# EAGLE board Hauptplatine_board (EAGLE 8.6.0)
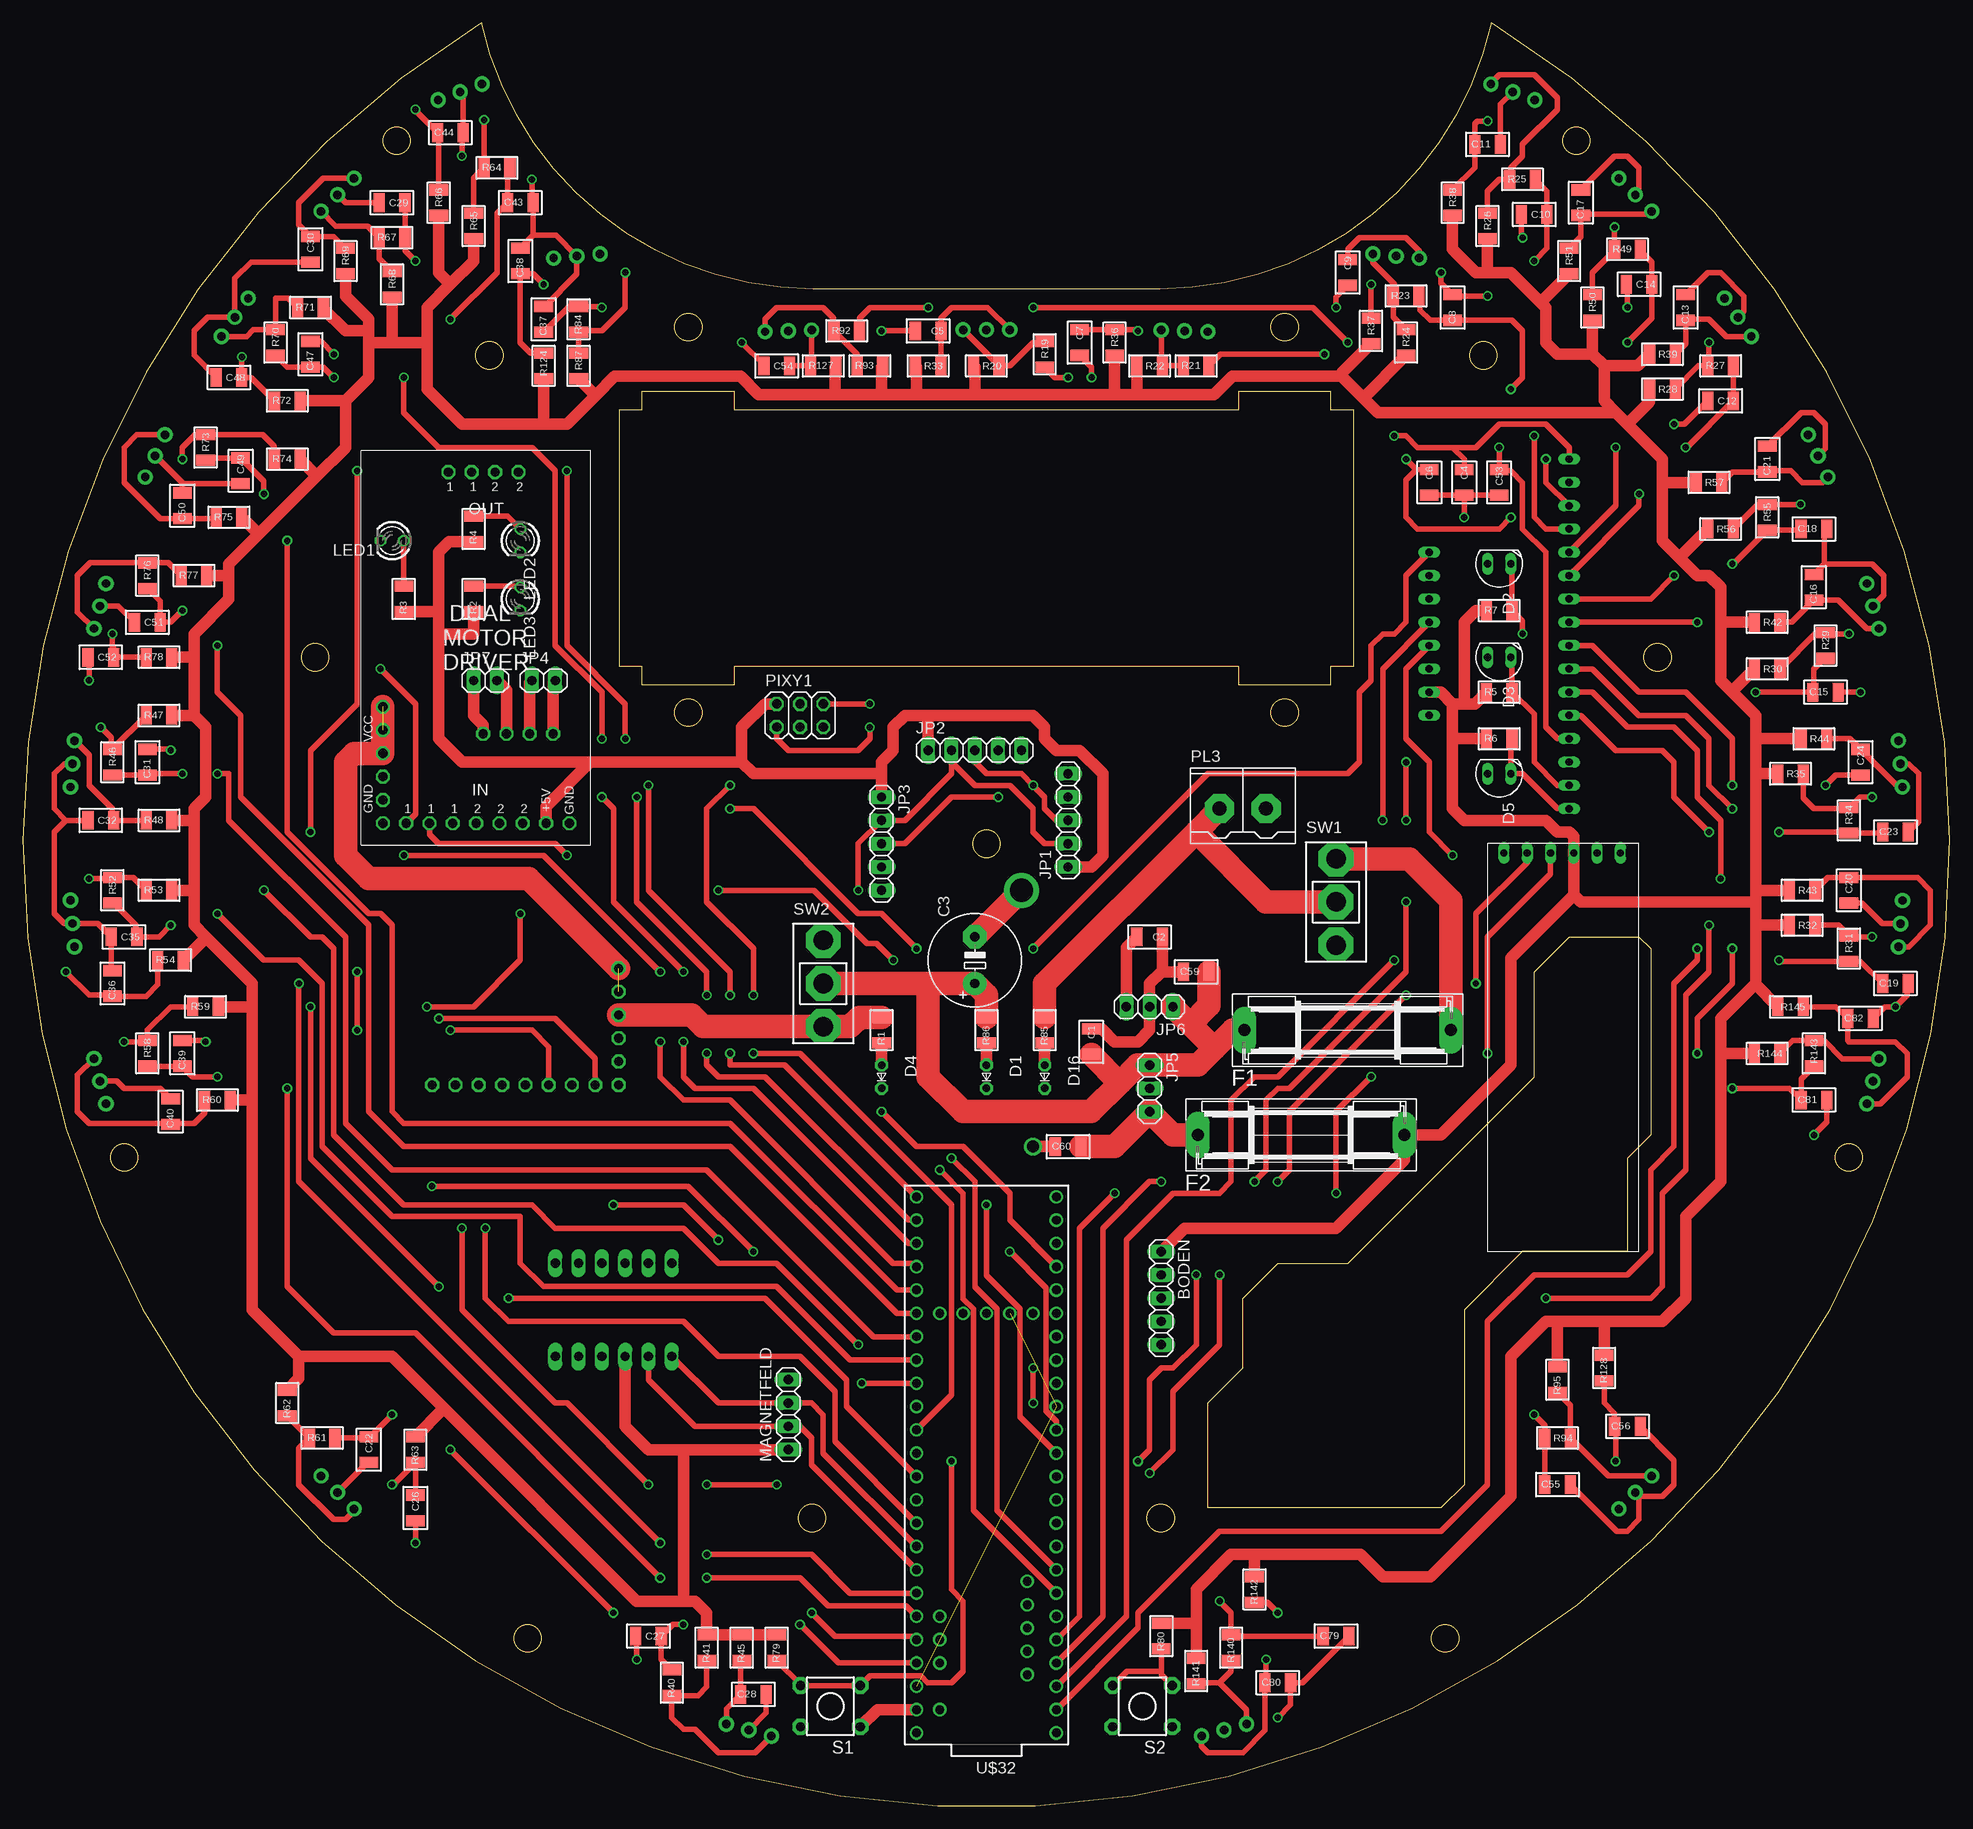
[diagram p0: board, top side]
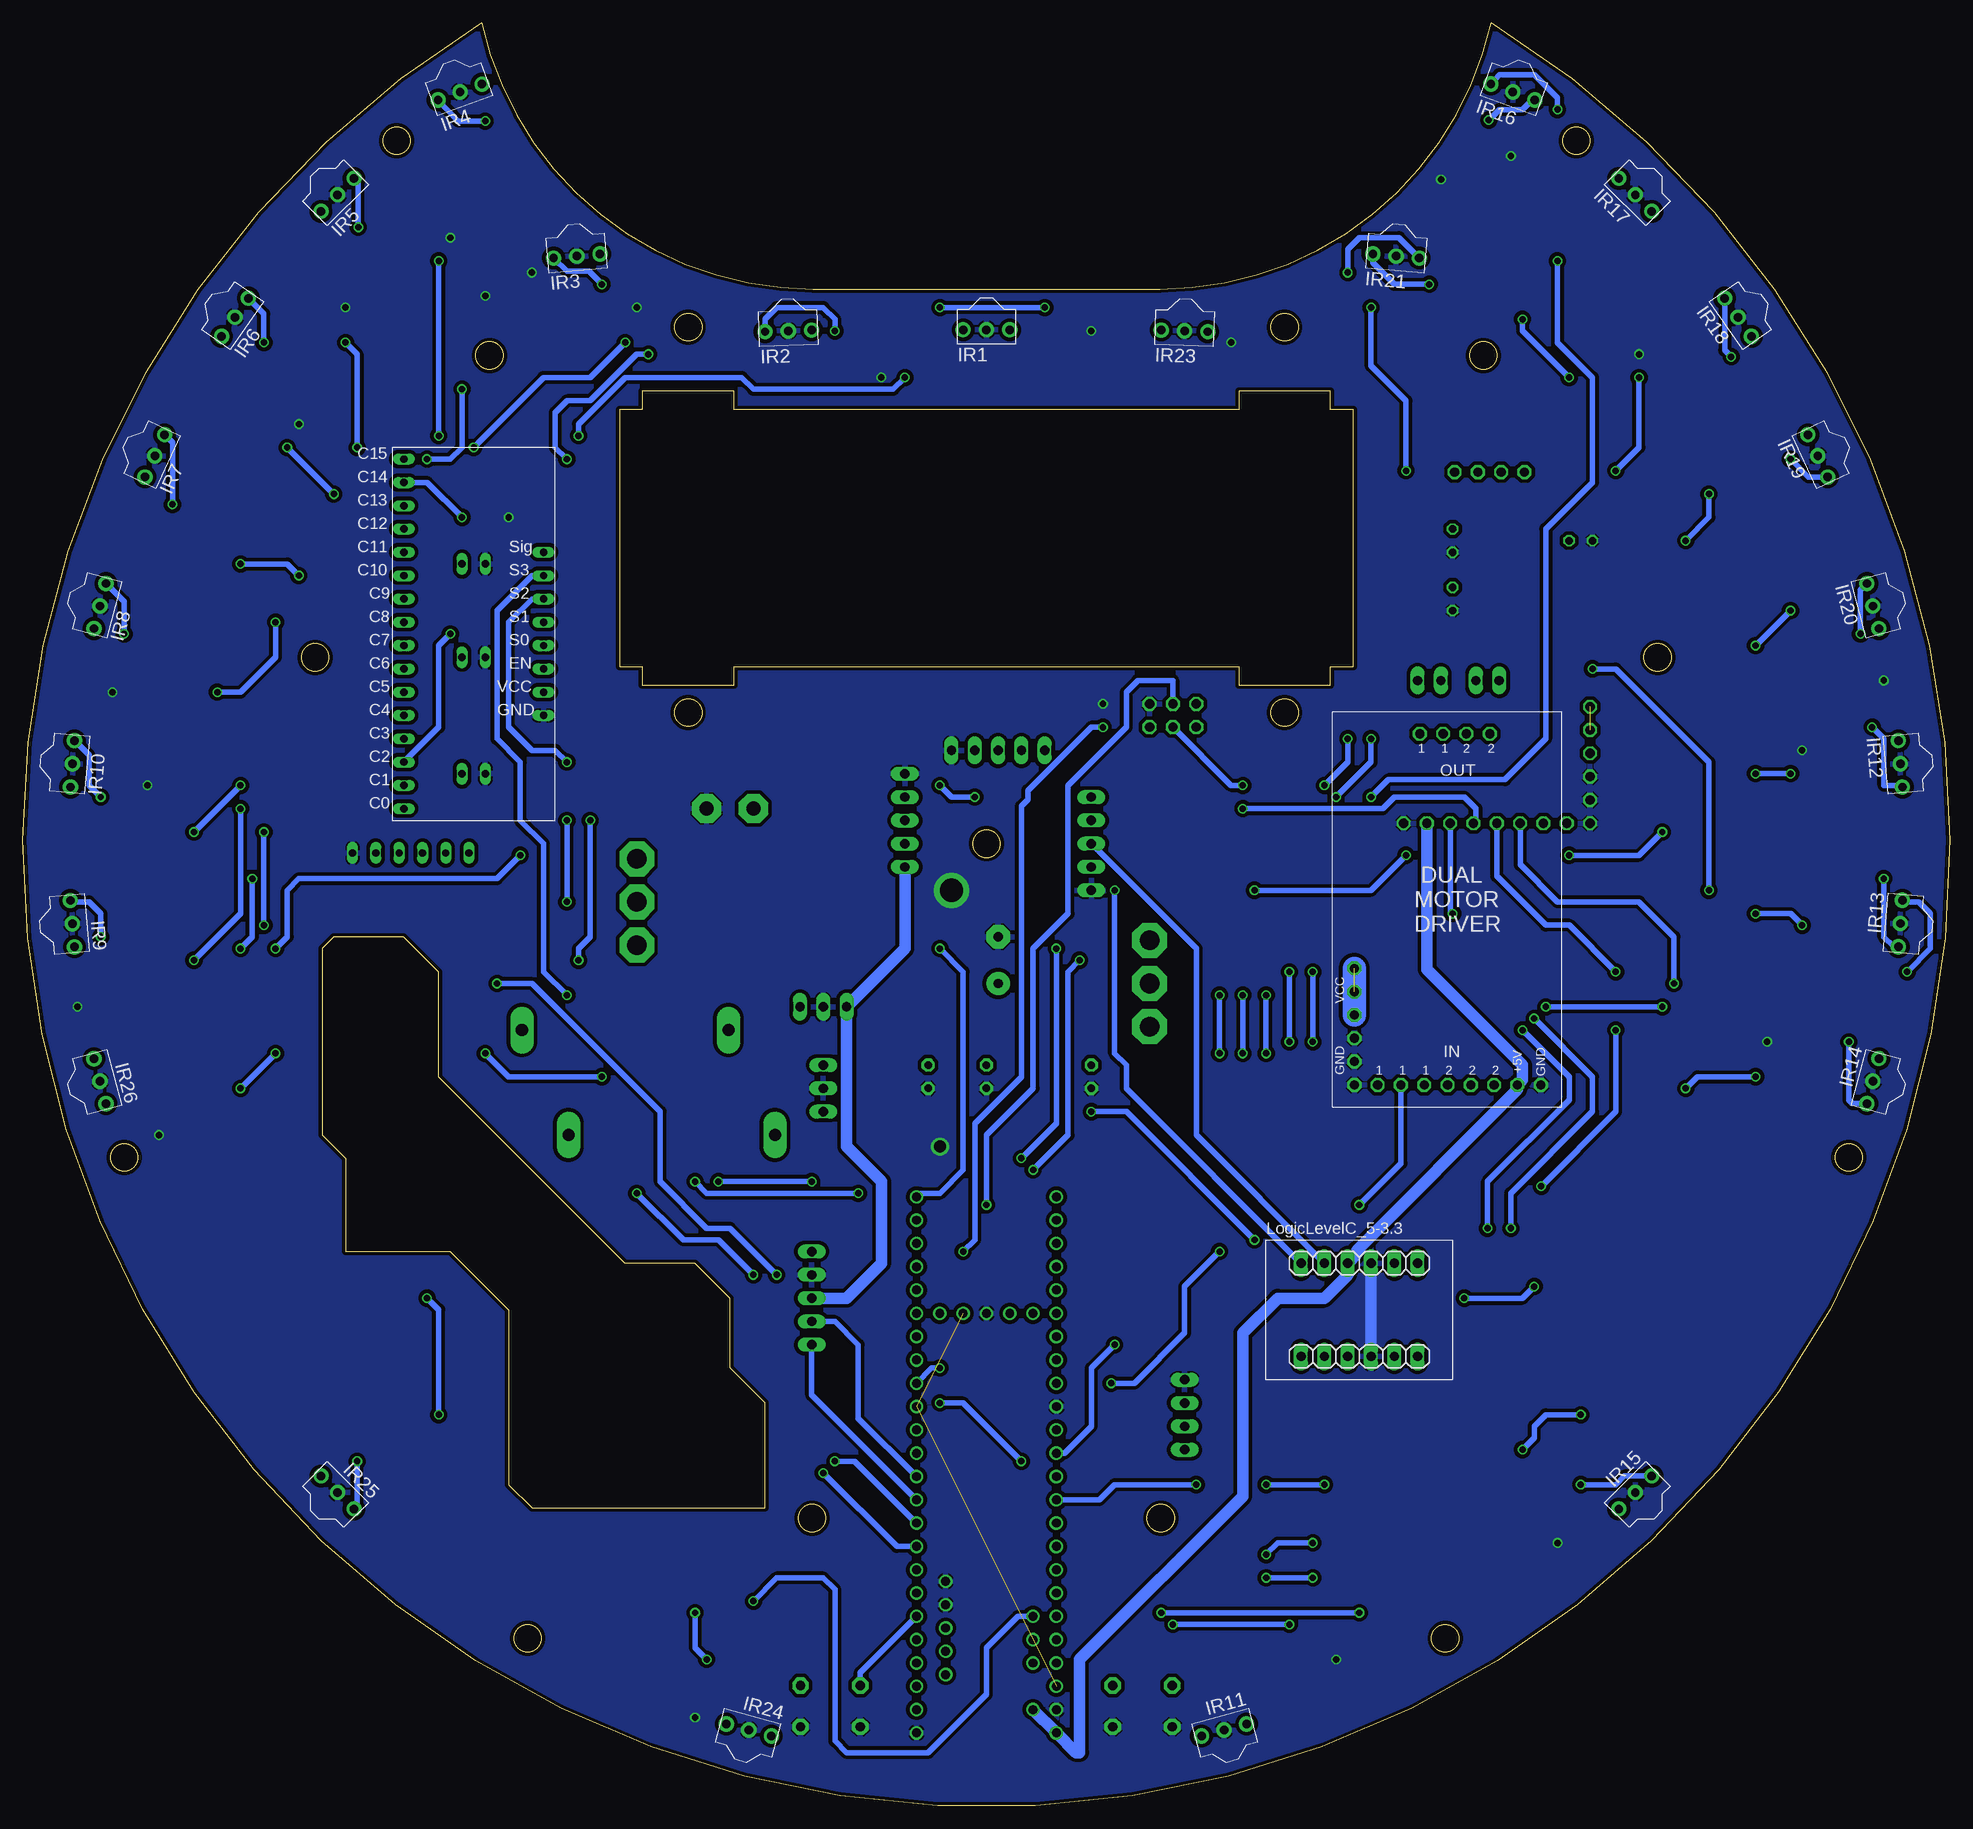
[diagram p1: board, bottom side, seen from below]

Size 210 x 194.31 mm. Coordinates in mm from the lower left corner, seen from the top.
Outline: 67.5,124.16 65,124.16 65,152.16 67.5,152.16 67.5,154.16 77.5,154.16 77.5,152.16 132.5,152.16 132.5,154.16 142.5,154.16 142.5,152.16 145,152.16 145,124.16 142.5,124.16 142.5,122.16 132.5,122.16 132.5,124.16 77.5,124.16 77.5,122.16 67.5,122.16 67.5,124.16
Outline: 50,194.31 arc297 160,194.31 arc-78 123.88,165.31 86.12,165.31 arc-78 50,194.31
Outline: 129.13,32.47 129.13,43.9 132.94,47.71 132.94,55.33 136.75,59.14 144.37,59.14 164.69,79.46 164.69,90.89 168.5,94.7 176.12,94.7 177.39,93.43 177.39,73.11 174.85,70.57 174.85,60.41 163.42,60.41 157.07,54.06 157.07,35.01 154.53,32.47 129.13,32.47
Outline: circle at 72.5,119.16 radius 1.5
Outline: circle at 137.5,119.16 radius 1.5
Outline: circle at 105,104.86 radius 1.5
Outline: circle at 31.85,125.16 radius 1.5
Outline: circle at 50.85,158.07 radius 1.5
Outline: circle at 178.15,125.16 radius 1.5
Outline: circle at 159.15,158.07 radius 1.5
Outline: circle at 124,31.36 radius 1.5
Outline: circle at 86,31.36 radius 1.5
Outline: circle at 137.5,161.16 radius 1.5
Outline: circle at 72.5,161.16 radius 1.5
Outline: circle at 169.28,181.47 radius 1.5
Outline: circle at 40.72,181.47 radius 1.5
Outline: circle at 155,18.26 radius 1.5
Outline: circle at 198.97,70.66 radius 1.5
Outline: circle at 55,18.26 radius 1.5
Outline: circle at 11.03,70.66 radius 1.5
Copper layers (1*16): Top 0.018mm / dielectric 1.55mm / Bottom 0.018mm
Design rules "Multi-CB_2L_100um-Tracks_OL35um": minimum track width 0.1mm, minimum drill 0.2mm, track to track 0.1mm, track to pad 0.1mm, pad to pad 0.1mm, via to via 0.1mm, smd to smd 0mil, copper to edge 0.2mm, drill to drill 0.2mm, minimum pad ring 0.125mm, minimum via ring 0.1mm, stop-mask expansion 2mil, vias tented up to drill 0.45mm, thermal gap 0.2mm

## Footprints (pad centres in the part's own frame; a part is rotated, then mirrored left to right if it is on the bottom)
1X05 = drill 1.016 long: 1 -5.08,0; 2 -2.54,0; 3 0,0; 4 2.54,0; 5 5.08,0
1206 = smd 1.219 x 2.032: 1 -1.397,0; 2 1.397,0
E5-10,5 = drill 1.016 pad 2.54: + -2.54,0 | drill 1.016 pad 2.54 octagon: - 2.54,0
L3R2-08 = drill 0.813 pad 1.397 octagon: 1 -1.27,0; 2 1.27,0
SFH205 = drill 0.813 long: A 0,-1.27; K 0,1.27
SH22,5 = drill 1.321 pad 2.54 long: 1 -11.252,0; 2 11.252,0
TSOP581X = drill 0.914 pad 1.651: 1 2.54,0; 2 0,0; 3 -2.54,0
1X02 = drill 1.016 long: 1 -1.27,0; 2 1.27,0
1X03 = drill 1.016 long: 1 -2.54,0; 2 0,0; 3 2.54,0
LED3MM = drill 0.813 octagon: A -1.27,0; K 1.27,0
1X04 = drill 1.016 long: 1 -3.81,0; 2 -1.27,0; 3 1.27,0; 4 3.81,0
2X03 = drill 1.016 octagon: 1 -2.54,-1.27; 2 -2.54,1.27; 3 0,-1.27; 4 0,1.27; 5 2.54,-1.27; 6 2.54,1.27
S940_2 = drill 1.524 pad 3.175 octagon: 1 -2.54,0; 2 2.54,0
KSM611A = drill 1.016 pad 1.778 octagon: A -3.25,2.25; B -3.25,-2.25; C 3.25,2.25; D 3.25,-2.25
MSS13ASP = drill 2.134 pad 3.81 octagon: 1 0,4.7; 2 0,-4.7; U 0,0
MOTOR_DRIVER_MODULE = drill 1 octagon: +5V 7.461,-20.479; GND@1 -10.319,-20.479; GND@2 -10.319,-17.939; GND@3 -10.319,-15.399; GND@4 10.001,-20.479; M1_FW -3.175,17.78; M1_FW_SIG -7.779,-20.479; M1_PWM_SIG -5.239,-20.479; M1_RW -0.635,17.78; M1_RW_SIG -2.699,-20.479; M2_FW 1.905,17.78; M2_FW_SIG -0.159,-20.479; M2_PWM_SIG 2.381,-20.479; M2_RW 4.445,17.78; M2_RW_SIG 4.921,-20.479; VCC@1 -10.319,-12.859; VCC@2 -10.319,-10.319; VCC@3 -10.319,-7.779
BLUETOTHA = drill 0.8 long: CTS 43.434,4.572; GND 43.434,2.032; RTS 43.434,14.732; RX 43.434,12.192; TX 43.434,9.652; VCC 43.434,7.112
TEENSY_3.6_ALL_PINS = drill 0.965: 0 -7.62,25.4; 1 -7.62,22.86; 2 -7.62,20.32; 3 -7.62,17.78; 3.3V 7.62,22.86; 3.3V3 -7.62,-7.62; 3.3V4 -2.54,-17.78; 4 -7.62,15.24; 5 -7.62,12.7; 6 -7.62,10.16; 7 -7.62,7.62; 8 -7.62,5.08; 9 -7.62,2.54; 10 -7.62,0; 11 -7.62,-2.54; 12 -7.62,-5.08; 13 7.62,-5.08; 14/A0 7.62,-2.54; 15/A1 7.62,0; 16/A2 7.62,2.54; 17/A3 7.62,5.08; 18/A4 7.62,7.62; 19/A5 7.62,10.16; 20/A6 7.62,12.7; 21/A7 7.62,15.24; 22/A8 7.62,17.78; 23/A9 7.62,20.32; 24 -7.62,-10.16; 25 -7.62,-12.7; 26 -7.62,-15.24; 27 -7.62,-17.78; 28 -7.62,-20.32; 29 -7.62,-22.86; 30 -7.62,-25.4; 31/A12 -7.62,-27.94; 32/A13 -7.62,-30.48; 33/A14 7.62,-30.48; 34/A15 7.62,-27.94; 35/A16 7.62,-25.4; 36/A17 7.62,-22.86; 37/A18 7.62,-20.32; 38/A19 7.62,-17.78; 39/A20 7.62,-15.24; A10 5.08,17.78; A11 5.08,15.24; A21 7.62,-12.7; A22 7.62,-10.16; AGND 7.62,25.4; AREF 5.08,20.32; D+ -4.445,16.51; D- -4.445,19.05; GND -7.62,27.94; GND1 7.62,-7.62; GND3 -4.445,13.97; GND4 -4.445,11.43; GND6 0,-17.78; PGM 2.54,-17.78; RESET 5.08,-17.78; VBAT -5.08,-17.78; VIN 7.62,27.94; VUSB 5.08,25.4; VUSB1 -4.445,21.59
LOGICLEVEL = drill 1.016 long: 1 -6.35,5.08; 2 -3.81,5.08; 3 -1.27,5.08; 4 1.27,5.08; 5 3.81,5.08; 6 6.35,5.08; 7 -6.35,-5.08; 8 -3.81,-5.08; 9 -1.27,-5.08; 10 1.27,-5.08; 11 3.81,-5.08; 12 6.35,-5.08
ANALOG/DIGITAL-MUX-BREAKOUT = drill 0.8 long: EN 16.51,16.51; GND 16.51,11.43; P$1 1.27,1.27; P$2 1.27,3.81; P$3 1.27,6.35; P$4 1.27,8.89; P$5 1.27,11.43; P$6 1.27,13.97; P$7 1.27,16.51; P$8 1.27,19.05; P$9 1.27,21.59; P$10 1.27,24.13; P$11 1.27,26.67; P$12 1.27,29.21; P$13 1.27,31.75; P$14 1.27,34.29; P$15 1.27,36.83; P$16 1.27,39.37; S0 16.51,19.05; S1 16.51,21.59; S2 16.51,24.13; S3 16.51,26.67; SIG 16.51,29.21; VCC 16.51,13.97

## Placement (x,y rotation side)
BODEN  [1X05]  124.05,55.33 270 top
C1  0.33 uF  [1206]  116.43,83.27 270 top
C2  0.1 uF  [1206]  122.78,94.7 180 top
C3  RAD 470/25  [E5-10,5]  103.73,92.16 90 top
C4  1u  [1206]  157.07,144.23 270 top
C5  100n  [1206]  98.65,160.74 180 top
C6  1u  [1206]  153.26,144.23 270 top
C7  100n  [1206]  115.16,159.47 270 top
C8  1u  [1206]  155.8,163.28 90 top
C9  100n  [1206]  144.37,167.09 270 top
C10  1u  [1206]  164.69,173.44 180 top
C11  100n  [1206]  159.61,181.06 0 top
C12  1u  [1206]  185.01,153.12 180 top
C13  100n  [1206]  181.2,163.28 90 top
C14  1u  [1206]  176.12,165.82 180 top
C15  1u  [1206]  196.44,121.37 0 top
C16  100n  [1206]  195.17,132.8 90 top
C17  100n  [1206]  169.77,174.71 90 top
C18  1u  [1206]  195.17,139.15 0 top
C19  1u  [1206]  204.06,89.62 0 top
C20  100n  [1206]  198.98,99.78 270 top
C21  100n  [1206]  190.09,146.77 90 top
C22  1u  [1206]  37.69,38.82 270 top
C23  1u  [1206]  204.06,106.13 0 top
C24  100n  [1206]  200.25,113.75 270 top
C26  100n  [1206]  42.77,32.47 270 top
C27  1u  [1206]  68.17,18.5 180 top
C28  100n  [1206]  79.6,12.15 0 top
C29  1u  [1206]  40.23,174.71 180 top
C30  100n  [1206]  31.34,169.63 270 top
C31  1u  [1206]  13.56,113.75 90 top
C32  100n  [1206]  8.48,107.4 180 top
C35  1u  [1206]  11.02,94.7 180 top
C36  100n  [1206]  9.75,89.62 90 top
C37  1u  [1206]  56.74,162.01 90 top
C38  100n  [1206]  54.2,168.36 90 top
C39  1u  [1206]  17.37,82 90 top
C40  100n  [1206]  16.1,75.65 90 top
C43  1u  [1206]  54.2,174.71 0 top
C44  100n  [1206]  46.58,182.33 0 top
C47  1u  [1206]  31.34,158.2 90 top
C48  100n  [1206]  22.45,155.66 180 top
C49  1u  [1206]  23.72,145.5 270 top
C50  100n  [1206]  17.37,141.69 90 top
C51  1u  [1206]  13.56,128.99 180 top
C52  100n  [1206]  8.48,125.18 180 top
C53  1u  [1206]  160.88,144.23 270 top
C54  100n  [1206]  82.14,156.93 180 top
C55  1u  [1206]  167.23,35.01 0 top
C56  100n  [1206]  174.85,41.36 0 top
C59  0,33 uF  [1206]  127.86,90.89 0 top
C60  0,1uF  [1206]  113.89,71.84 0 top
C79  1u  [1206]  143.1,18.5 0 top
C80  100n  [1206]  136.75,13.42 0 top
C81  1u  [1206]  195.17,76.92 0 top
C82  100n  [1206]  200.25,85.81 0 top
D1  LED 6mm weiß  [L3R2-08]  105,79.46 270 top
D2  SFH205  [SFH205]  160.88,135.34 270 top
D3  SFH205  [SFH205]  160.88,125.18 270 top
D4  LED 6mm weiß  [L3R2-08]  93.57,79.46 270 top
D5  SFH205  [SFH205]  160.88,112.48 270 top
D16  LED 6mm gruen  [L3R2-08]  111.35,79.46 270 top
F1  [SH22,5]  144.37,84.54 0 top
F2  [SH22,5]  139.29,73.11 0 top
IR1  TSOP4038  [TSOP581X]  105,160.86 0 bottom
IR2  TSOP4038  [TSOP581X]  126.59,160.74 2 bottom
IR3  TSOP4038  [TSOP581X]  149.64,168.9 5 bottom
IR4  TSOP4038  [TSOP581X]  162.36,186.77 20 bottom
IR5  TSOP4038  [TSOP581X]  175.71,175.57 45 bottom
IR6  TSOP4038  [TSOP581X]  186.9,162.22 55 bottom
IR7  TSOP4038  [TSOP581X]  195.63,147.12 65 bottom
IR8  TSOP4038  [TSOP581X]  201.6,130.75 75 bottom
IR9  TSOP4038  [TSOP581X]  204.61,96.14 95 bottom
IR10  TSOP4038  [TSOP581X]  204.6,113.56 85 bottom
IR11  TSOP4038  [TSOP581X]  79.11,8.26 195 bottom
IR12  TSOP4038  [TSOP581X]  5.4,113.56 275 bottom
IR13  TSOP4038  [TSOP581X]  5.4,96.16 265 bottom
IR14  TSOP4038  [TSOP581X]  8.4,78.98 255 bottom
IR15  TSOP4038  [TSOP581X]  34.29,34.15 225 bottom
IR16  TSOP4038  [TSOP581X]  47.64,186.78 340 bottom
IR17  TSOP4038  [TSOP581X]  34.29,175.57 315 bottom
IR18  TSOP4038  [TSOP581X]  23.09,162.22 305 bottom
IR19  TSOP4038  [TSOP581X]  14.4,147.12 295 bottom
IR20  TSOP4038  [TSOP581X]  8.4,130.75 285 bottom
IR21  TSOP4038  [TSOP581X]  60.36,168.9 355 bottom
IR23  TSOP4038  [TSOP581X]  83.41,160.74 358 bottom
IR24  TSOP4038  [TSOP581X]  130.89,8.26 165 bottom
IR25  TSOP4038  [TSOP581X]  175.71,34.15 135 bottom
IR26  TSOP4038  [TSOP581X]  201.6,78.97 105 bottom
JP1  [1X05]  113.89,107.4 90 top
JP2  [1X05]  103.73,115.02 0 top
JP3  [1X05]  93.57,104.86 270 top
JP4  [1X02]  56.74,122.64 0 top
JP5  [1X03]  122.78,78.19 270 top
JP6  [1X03]  122.78,87.08 180 top
JP7  [1X02]  50.39,122.64 0 top
LED1  [LED3MM]  40.23,137.88 180 top
LED2  [LED3MM]  54.2,137.88 270 top
LED3  [LED3MM]  54.2,131.53 270 top
MAGNETFELD  [1X04]  83.41,42.63 90 top
PIXY1  [2X03]  84.68,118.83 0 top
PL3  STLZ950G2  [S940_2]  132.94,108.67 0 top
R1  4.7k  [1206]  93.57,84.54 90 top
R2  60R  [1206]  49.12,131.53 90 top
R3  60R  [1206]  41.5,131.53 90 top
R4  60R  [1206]  49.12,139.15 90 top
R5  5k  [1206]  160.88,121.37 0 top
R6  5k  [1206]  160.88,116.29 0 top
R7  5k  [1206]  160.88,130.26 0 top
R19  100k  [1206]  111.35,158.2 270 top
R20  4.7k  [1206]  105,156.93 180 top
R21  100k  [1206]  127.86,156.93 0 top
R22  4.7k  [1206]  122.78,156.93 180 top
R23  100k  [1206]  150.72,164.55 0 top
R24  4.7k  [1206]  150.72,159.47 270 top
R25  100k  [1206]  163.42,177.25 0 top
R26  4.7k  [1206]  159.61,172.17 270 top
R27  100k  [1206]  185.01,156.93 0 top
R28  4.7k  [1206]  178.66,154.39 180 top
R29  100k  [1206]  196.44,126.45 270 top
R30  4.7k  [1206]  190.09,123.91 180 top
R31  100k  [1206]  198.98,93.43 270 top
R32  4.7k  [1206]  193.9,95.97 180 top
R33  10R  [1206]  98.65,156.93 180 top
R34  100k  [1206]  198.98,107.4 270 top
R35  4.7k  [1206]  192.63,112.48 180 top
R36  10R  [1206]  118.97,159.47 270 top
R37  10R  [1206]  146.91,160.74 270 top
R38  10R  [1206]  155.8,174.71 270 top
R39  10R  [1206]  178.66,158.2 180 top
R40  100k  [1206]  70.71,13.42 90 top
R41  4.7k  [1206]  74.52,17.23 90 top
R42  10R  [1206]  190.09,128.99 180 top
R43  10R  [1206]  193.9,99.78 180 top
R44  10R  [1206]  195.17,116.29 180 top
R45  10R  [1206]  78.33,17.23 90 top
R46  100k  [1206]  9.75,113.75 270 top
R47  4.7k  [1206]  14.83,118.83 0 top
R48  10R  [1206]  14.83,107.4 0 top
R49  100k  [1206]  174.85,169.63 0 top
R50  4.7k  [1206]  171.04,163.28 270 top
R51  10R  [1206]  168.5,168.36 270 top
R52  100k  [1206]  9.75,99.78 270 top
R53  4.7k  [1206]  14.83,99.78 0 top
R54  10R  [1206]  16.1,92.16 0 top
R55  100k  [1206]  190.09,140.42 270 top
R56  4.7k  [1206]  185.01,139.15 180 top
R57  10R  [1206]  183.74,144.23 180 top
R58  100k  [1206]  13.56,82 270 top
R59  4.7k  [1206]  19.91,87.08 0 top
R60  10R  [1206]  21.18,76.92 0 top
R61  100k  [1206]  32.61,40.09 0 top
R62  4.7k  [1206]  28.8,43.9 90 top
R63  10R  [1206]  42.77,38.82 90 top
R64  100k  [1206]  51.66,178.52 0 top
R65  4.7k  [1206]  49.12,172.17 270 top
R66  10R  [1206]  45.31,174.71 270 top
R67  100k  [1206]  40.23,170.9 0 top
R68  4.7k  [1206]  40.23,165.82 270 top
R69  10R  [1206]  35.15,168.36 270 top
R70  100k  [1206]  27.53,159.47 270 top
R71  4.7k  [1206]  31.34,163.28 0 top
R72  10R  [1206]  28.8,153.12 0 top
R73  100k  [1206]  19.91,148.04 270 top
R74  4.7k  [1206]  28.8,146.77 0 top
R75  10R  [1206]  22.45,140.42 0 top
R76  100k  [1206]  13.56,134.07 270 top
R77  4.7k  [1206]  18.64,134.07 0 top
R78  10R  [1206]  14.83,125.18 0 top
R79  4.7k  [1206]  82.14,17.23 90 top
R80  4.7k  [1206]  124.05,18.5 90 top
R84  100k  [1206]  60.55,162.01 90 top
R85  4.7k  [1206]  111.35,84.54 90 top
R86  4.7k  [1206]  105,84.54 90 top
R87  4.7k  [1206]  60.55,156.93 270 top
R92  100k  [1206]  89.76,160.74 0 top
R93  4.7k  [1206]  92.3,156.93 0 top
R94  100k  [1206]  167.23,40.09 180 top
R95  4.7k  [1206]  167.23,46.44 90 top
R124  10R  [1206]  56.74,156.93 270 top
R127  10R  [1206]  87.22,156.93 0 top
R128  10R  [1206]  172.31,47.71 90 top
R140  100k  [1206]  131.67,17.23 90 top
R141  4.7k  [1206]  127.86,14.69 90 top
R142  10R  [1206]  134.21,23.58 90 top
R143  100k  [1206]  195.17,82 270 top
R144  4.7k  [1206]  190.09,82 180 top
R145  10R  [1206]  192.63,87.08 180 top
S1  [KSM611A]  88,10.86 180 top
S2  [KSM611A]  122,10.86 180 top
SW1  Schukat_MS111  [MSS13ASP]  143.1,98.51 0 top
SW2  Schukat_MS111  [MSS13ASP]  87.22,89.62 0 top
U$1  MOTOR_DRIVER_MODULE  [MOTOR_DRIVER_MODULE]  49.54,127.56 0 top
U$6  MOTOR_DRIVER_MODULE  [MOTOR_DRIVER_MODULE]  54.59,99.05 0 bottom
U$28  BLUETOTHA  [BLUETOTHA]  176.12,60.41 90 top
U$32  TEENSY_3.6_ALL_PINS  [TEENSY_3.6_ALL_PINS]  105,35.89 180 top
U$58  LOGICLEVEL  [LOGICLEVEL]  64.36,54.06 0 bottom
X1  ANALOG/DIGITAL-MUX-BREAKOUT  [ANALOG/DIGITAL-MUX-BREAKOUT]  169.77,107.4 0 bottom

## Library data of the parts
BODEN JP1-JP7 MAGNETFELD PIXY1 = pinhead
C1 C2 C4-C24 C26-C32 C35-C40 C43 C44 C47-C56 C59 C60 C79-C82 = C
C3 = rcl
D1 D4 D16 = d
D2 D3 D5 = opto-trans-siemens; OC_FARNELL: unknown; OC_NEWARK: unknown
F1 F2 = fuse; MF: SCHURTER; MPN: 0031.8201; OC_FARNELL: 1162740; OC_NEWARK: 96F8317
IR1-IR21 IR23-IR26 = robotikbauteile
LED1-LED3 = led
PL3 = KLEMMEN
R1-R7 R19-R80 R84-R87 R92-R95 R124 R127 R128 R140-R145 = R
S1 S2 SW1 SW2 = schalter_taster
U$1 U$6 = motor_driver_module_library
U$28 = Bluetoth
U$32 = Teensy_3_and_LC_Series_Boards_v1.4
U$58 = LOGICLeVELCONVERTER
X1 = Analog-Digital

## Nets
3.3V: U$32.3.3V U$32.3.3V3 U$32.3.3V4
+3V3: BODEN.1 F2.2 MAGNETFELD.1 R5.1 R6.1 R7.1 R20.2 R22.2 R24.2 R26.2 R28.2 R30.2 R32.2 R33.2 R35.2 R36.2 R37.2 R38.2 R39.2 R41.2 R42.2 R43.2 R44.2 R45.2 R47.2 R48.2 R50.2 R51.2 R53.2 R54.2 R56.2 R57.2 R59.2 R60.2 R62.2 R63.2 R65.2 R66.2 R68.2 R69.2 R71.2 R72.2 R74.2 R75.2 R77.2 R78.2 R79.2 R80.2 R87.2 R93.2 R95.2 R124.2 R127.2 R128.2 R141.2 R142.2 R144.2 R145.2 U$28.VCC U$58.9 X1.VCC
+5V: BODEN.3 C2.2 JP1.1 JP2.1 JP3.1 JP6.3 PIXY1.2 R2.1 R3.1 R4.1 U$1.+5V U$6.+5V U$32.VIN U$32.VUSB U$58.3
+12V: C1.2 C3.+ C59.2 F1.1 JP5.1 JP6.1 R86.2 SW2.U
+12V1: R1.2 SW2.2 U$1.VCC@1 U$1.VCC@2 U$1.VCC@3 U$6.VCC@1 U$6.VCC@2 U$6.VCC@3
A_01: C4.1 R19.2 X1.P$16
A_02: C6.1 R21.2 X1.P$15
A_03: C8.1 R23.2 X1.P$14
A_04: C10.1 R25.2 X1.P$13
A_05: C14.1 R49.2 X1.P$12
A_06: C12.1 R27.2 X1.P$11
A_07: C18.1 R55.2 X1.P$10
A_08: C15.1 R29.2 X1.P$9
A_09: C19.1 R31.2 X1.P$7
A_10: C23.1 R34.2 X1.P$8
A_11: C27.1 R40.2 U$32.23/A9
A_12: C31.1 R46.2 U$32.39/A20
A_13: C35.1 R52.2 U$32.A21
A_14: C39.1 R58.2 U$32.21/A7
A_15: C22.1 R61.2 U$32.22/A8
A_16: C43.1 R64.2 U$32.34/A15
A_17: C29.1 R67.2 U$32.35/A16
A_18: C47.1 R70.2 U$32.36/A17
A_19: C49.1 R73.2 U$32.37/A18
A_20: C51.1 R76.2 U$32.38/A19
A_21: C37.1 R84.2 U$32.33/A14
A_24: C53.1 R92.2 X1.P$4
A_25: C79.1 R140.2 U$32.A11
A_26: C55.1 R94.2 X1.P$5
A_27: C81.1 R143.2 X1.P$6
AA_00: U$32.32/A13 X1.SIG
AREF: U$32.AREF
D1.1__FW: U$1.M1_FW_SIG U$32.14/A0
D1.2__RW: U$1.M1_RW_SIG U$32.20/A6
D2.1__FW: U$1.M2_FW_SIG U$32.A22
D2.2__RW: U$1.M2_RW_SIG U$32.15/A1
D3.1__FW: U$6.M1_FW_SIG U$32.16/A2
D3.2__RW: U$6.M1_RW_SIG U$32.17/A3
GND: BODEN.2 C1.1 C2.1 C3.- C4.2 C5.2 C6.2 C7.2 C8.2 C9.2 C10.2 C11.2 C12.2 C13.2 C14.2 C15.2 C16.2 C17.2 C18.2 C19.2 C20.2 C21.2 C22.2 C23.2 C24.2 C26.2 C27.2 C28.2 C29.2 C30.2 C31.2 C32.2 C35.2 C36.2 C37.2 C38.2 C39.2 C40.2 C43.2 C44.2 C47.2 C48.2 C49.2 C50.2 C51.2 C52.2 C53.2 C54.2 C55.2 C56.2 C59.1 C60.1 C79.2 C80.2 C81.2 C82.2 D1.2 D2.A D3.A D4.2 D5.A D16.2 IR1.2 IR2.2 IR3.2 IR4.2 IR5.2 IR6.2 IR7.2 IR8.2 IR9.2 IR10.2 IR11.2 IR12.2 IR13.2 IR14.2 IR15.2 IR16.2 IR17.2 IR18.2 IR19.2 IR20.2 IR21.2 IR23.2 IR24.2 IR25.2 IR26.2 JP1.5 JP2.5 JP3.5 JP5.2 JP6.2 LED1.K LED2.K LED3.K MAGNETFELD.4 PIXY1.6 PL3.2 S1.A S1.C S2.A S2.C U$1.GND@1 U$1.GND@2 U$1.GND@3 U$1.GND@4 U$6.GND@1 U$6.GND@2 U$6.GND@3 U$6.GND@4 U$28.GND U$32.AGND U$32.GND U$32.GND1 U$32.GND3 U$32.GND4 U$32.GND6 U$58.4 U$58.10 X1.GND
K1: R79.1 S1.B S1.D U$32.24
K2: R80.1 S2.B S2.D U$32.4
LI1: D5.K R6.2 X1.P$1
LI2: D3.K R5.2 X1.P$2
LI3: D2.K R7.2 X1.P$3
MISO: PIXY1.1 U$32.12
MOSI: PIXY1.4 U$32.11
N$1: JP4.2 U$6.M1_FW
N$2: F1.2 SW1.1
N$3: JP4.1 U$6.M1_RW
N$4: C60.2 F2.1 JP5.3
N$5: JP7.2 U$6.M2_FW
N$6: JP7.1 U$6.M2_RW
N$7: LED3.A R2.2
N$8: LED1.A R3.2
N$10: LED2.A R4.2
N$12: D4.1 R1.1
N$13: PIXY1.5
N$20: PL3.1 R85.2 SW1.U
N$21: IR1.1 R19.1 R20.1
N$24: C5.1 IR1.3 R33.1
N$25: IR2.1 R21.1 R22.1
N$26: C7.1 IR2.3 R36.1
N$27: IR3.1 R23.1 R24.1
N$28: C9.1 IR3.3 R37.1
N$29: IR4.1 R25.1 R26.1
N$30: C11.1 IR4.3 R38.1
N$31: IR6.1 R27.1 R28.1
N$32: C13.1 IR6.3 R39.1
N$33: IR8.1 R29.1 R30.1
N$34: IR9.1 R31.1 R32.1
N$35: C20.1 IR9.3 R43.1
N$36: IR10.1 R34.1 R35.1
N$37: C24.1 IR10.3 R44.1
N$38: C16.1 IR8.3 R42.1
N$39: IR5.1 R49.1 R50.1
N$40: IR11.1 R40.1 R41.1
N$41: C28.1 IR11.3 R45.1
N$42: IR12.1 R46.1 R47.1
N$43: C32.1 IR12.3 R48.1
N$44: C17.1 IR5.3 R51.1
N$45: IR7.1 R55.1 R56.1
N$46: C21.1 IR7.3 R57.1
N$47: IR15.1 R61.1 R62.1
N$48: C26.1 IR15.3 R63.1
N$49: IR17.1 R67.1 R68.1
N$50: C30.1 IR17.3 R69.1
N$51: IR21.1 R84.1 R87.1
N$52: C38.1 IR21.3 R124.1
N$53: IR13.1 R52.1 R53.1
N$54: C36.1 IR13.3 R54.1
N$59: IR14.1 R58.1 R59.1
N$60: C40.1 IR14.3 R60.1
N$61: IR23.1 R92.1 R93.1
N$62: C54.1 IR23.3 R127.1
N$63: IR25.1 R94.1 R95.1
N$64: C56.1 IR25.3 R128.1
N$66: IR16.1 R64.1 R65.1
N$67: C44.1 IR16.3 R66.1
N$72: IR18.1 R70.1 R71.1
N$73: C48.1 IR18.3 R72.1
N$75: IR19.1 R73.1 R74.1
N$76: C50.1 IR19.3 R75.1
N$78: IR20.1 R76.1 R77.1
N$79: C52.1 IR20.3 R78.1
N$100: IR24.1 R140.1 R141.1
N$101: C80.1 IR24.3 R142.1
N$102: IR26.1 R143.1 R144.1
N$103: C82.1 IR26.3 R145.1
N$107: D16.1 R85.1
N$113: D1.1 R86.1
PWM_M1: U$1.M1_PWM_SIG U$32.5
PWM_M2: U$1.M2_PWM_SIG U$32.6
PWM_M3: U$6.M1_PWM_SIG U$32.29
RX2: BODEN.5 U$32.9
RXB: U$28.TX U$32.7
S_0: U$32.0 X1.S0
S_1: U$32.1 X1.S1
S_2: U$32.2 X1.S2
S_3: U$32.3 X1.S3
SCK: PIXY1.3 U$32.13
SCL_2: MAGNETFELD.2 U$32.19/A5 U$58.8
SCL_ULT: JP1.3 JP2.3 JP3.3 U$58.2
SDA_2: MAGNETFELD.3 U$32.18/A4 U$58.7
SDA_ULT: JP1.2 JP2.2 JP3.2 U$58.1
TX2: BODEN.4 U$32.10
TXB: U$28.RX U$32.8
VBAT: U$32.VBAT
VUSB1: U$32.VUSB1

## Tracks (layer width: path | path; a pad name or v marks a point on that pad's centre or on a via)
3.3V  (2 unrouted)
+3V3
  Top 1.27: 167.23,52.79 165.96,52.79 162.15,48.98 162.15,33.74 153.39,24.98 148.18,24.98 145.77,27.39 134.21,27.39 | 167.23,52.79 172.31,52.79 | 172.31,52.79 178.66,52.79 181.2,55.33 181.2,64.22 185.01,68.03 185.01,82 | 185.01,82 185.01,85.81 188.82,89.62 | 186.28,121.37 188.82,118.83 188.82,116.29 | 186.28,121.37 185.01,122.64 185.01,128.99 | 185.01,128.99 185.01,132.8 183.74,134.07 182.47,134.07 180.56,135.98 | 180.56,135.98 178.66,137.88 178.66,144.23 | 178.66,144.23 178.66,146.77 174.85,150.58 | 174.85,150.58 173.58,151.85 | 173.58,151.85 172.31,153.12 172.31,156.93 | 172.31,156.93 171.04,158.2 | 171.04,158.2 167.23,158.2 165.96,159.47 165.96,163.28 165.32,163.92 | 165.32,163.92 162.15,167.09 159.61,167.09 | 188.82,89.62 188.82,95.97 | 188.82,95.97 188.82,98.51 | 188.82,98.51 188.82,99.78 | 188.82,99.78 188.82,112.48 | 188.82,112.48 188.82,116.29 | R141.2 127.86,19.77 | 127.86,19.77 127.86,23.58 131.67,27.39 134.21,27.39 | R142.2 134.21,27.39 | R95.2 167.23,52.79 | R128.2 172.31,52.79 | R144.2 185.01,82 | R145.2 188.82,89.5 188.82,89.62 | R32.2 188.82,95.97 | R43.2 188.82,99.78 | R44.2 188.82,116.29 | R30.2 186.28,121.5 186.28,121.37 | R42.2 185.01,128.99 | R56.2 180.56,136.11 180.56,135.98 | R57.2 178.66,144.23 | R28.2 177.26,153 174.85,150.58 | R39.2 175.99,156.93 172.31,156.93 | R50.2 171.04,158.2 | R51.2 165.45,163.92 165.32,163.92 | 159.61,167.09 158.34,167.09 155.8,169.63 R38.2 | R26.2 159.61,167.09 | 146,153.49 147.64,151.85 173.58,151.85 | 146,153.49 143.68,155.81 | 143.68,155.81 131.82,155.81 129.82,153.81 121.51,153.81 | 121.51,153.81 118.97,153.81 | 118.97,153.81 103.73,153.81 | 103.73,153.81 97.38,153.81
  Top 1.27: 97.38,153.81 93.57,153.81 | 93.57,153.81 88.49,153.81 | 88.49,153.81 80.18,153.81 78.18,155.81 64.5,155.81 62.45,153.76 | R37.2 143.68,156.12 143.68,155.81 | R24.2 146.13,153.49 146,153.49 | 56.74,150.58 59.28,150.58 62.45,153.76 | 56.74,150.58 47.85,150.58 44.04,154.39 44.04,159.47 | 46.58,165.82 44.04,163.28 44.04,159.47 | 46.58,165.82 49.12,168.36 R65.2 | 44.04,159.47 40.23,159.47 | 40.23,159.47 37.69,159.47 | 31.97,144.87 35.15,148.04 35.15,153.12 | 31.97,144.87 25.62,138.52 | R66.2 45.31,167.09 46.58,165.82 | R68.2 40.23,159.47 | R69.2 35.15,164.55 37.69,162.01 37.69,160.74 | 37.69,160.74 37.69,159.47 | R71.2 32.74,163.16 35.15,160.74 37.69,160.74 | 35.15,153.12 R72.2 | R74.2 31.97,145 31.97,144.87 | 25.62,138.52 22.45,135.34 22.45,134.07 | R75.2 25.62,138.65 25.62,138.52 | R77.2 22.45,134.07 | 18.64,125.18 18.64,127.72 22.45,131.53 22.45,134.07 | R78.2 18.64,125.18 | 19.91,94.7 18.64,95.97 18.64,99.78 | 19.91,94.7 24.99,89.62 24.99,87.08 | 18.64,125.18 18.64,118.83 | 18.64,107.4 18.64,99.78 | 24.99,87.08 24.99,76.92 | 24.99,76.92 24.99,54.06 30.07,48.98 | 30.07,48.98 40.23,48.98 45.94,43.27 | 45.94,43.27 66.9,22.31 71.98,22.31 | 71.98,22.31 73.25,22.31 74.52,21.04 R41.2 R45.2 R79.2 | R47.2 18.64,118.83 | R48.2 18.64,107.4 | R53.2 18.64,99.78 | R54.2 19.91,94.58 19.91,94.7 | R59.2 24.99,87.08 | R60.2 24.99,76.92 | R62.2 30.07,46.57 30.07,48.98 | R63.2 45.82,43.27 45.94,43.27 | R80.2 127.73,19.9 127.86,19.77 | 18.64,107.4 18.64,108.67 19.91,109.94 19.91,117.56 18.64,118.83 | MAGNETFELD.1 71.98,38.82 | 71.98,38.82 68.17,38.82 65.63,41.36 U$58.9 | 71.98,22.31 71.98,38.82 | U$28.VCC 169.01,99.28 | 169.01,99.28 169.77,98.51 188.82,98.51
  Top 1.27: U$28.VCC 169.01,104.36 | R127.2 88.49,156.81 88.49,153.81 | R93.2 93.57,156.81 93.57,153.81 | R36.2 118.97,153.81 | R22.2 121.38,153.93 121.51,153.81 | R124.2 56.74,150.58 | R87.2 62.33,153.76 62.45,153.76 | R35.2 188.82,112.48 | 35.15,153.12 37.69,155.66 37.69,159.47 | U$28.VCC 169.01,105.63 168.5,106.13 167.23,106.13 165.96,107.4 157.07,107.4 155.8,108.67 155.8,116.29 | 155.8,120.1 154.53,121.37 X1.VCC | 155.8,116.29 155.8,120.1 | 155.8,116.29 R6.1 | 155.8,120.1 157.07,120.1 | 157.07,120.1 158.21,120.1 R5.1 | R7.1 158.34,130.26 157.07,128.99 157.07,120.1 | BODEN.1 126.59,62.95 143.1,62.95 150.54,70.4 F2.2 154.53,73.11 162.15,80.73 162.15,92.42 169.01,99.28 | R20.2 103.73,156.81 103.73,153.81 | R33.2 97.38,156.81 97.38,153.81
+5V
  Top 1.27: JP6.3 120.24,93.56 C2.2 | 98.65,118.83 110.08,118.83 111.35,117.56 111.35,116.29 112.62,115.02 115.16,115.02 117.7,112.48 117.7,103.59 116.43,102.32 JP1.1 | 98.65,118.83 96.11,118.83 94.84,117.56 94.84,115.02 93.57,113.75 93.57,112.48 | JP2.1 98.65,118.83 | JP3.1 93.57,112.48 | 78.33,113.75 61.82,113.75 | U$1.+5V 57,108.94 61.82,113.75 | 78.33,113.75 78.33,117.56 80.87,120.1 PIXY1.2 | 61.82,113.75 47.85,113.75 45.31,116.29 45.31,127.72 | 45.31,127.72 45.31,130.26 | R3.1 45.18,130.14 45.31,130.26 | R2.1 49.12,127.72 45.31,127.72 | R4.1 46.45,137.76 45.31,136.61 45.31,130.26 | 78.33,113.75 79.6,112.48 93.57,112.48
  Bottom 1.27: JP1.1 113.89,93.43 JP6.3 120.24,71.84 116.43,68.03 116.43,59.14 120.24,55.33 BODEN.3 | U$1.+5V 57,91.16 46.58,80.73 46.58,79.12 U$6.+5V 47.13,78.06 64.64,60.55 64.64,60.14 U$58.3 65.63,57.87 68.17,55.33 73.25,55.33 77.06,51.52 77.06,33.74 94.84,15.96 94.84,5.8 95.23,5.8 U$32.VIN U$32.VUSB
+12V
  Top 2.54: 125.45,87.21 JP6.1 127.22,85.18 | 129.85,82.55 128.04,80.73 JP5.1 121.47,80.73 119.58,78.85 | 129.85,82.55 127.22,85.18 | 98.65,89.62 C3.+ 105,88.35 R86.2 | 98.65,89.62 98.65,79.46 102.46,75.65 116.39,75.65 119.58,78.85 | 127.22,85.18 129.26,87.21 C59.2 | SW2.U 98.65,89.62 | 129.85,82.55 131.85,84.54 F1.1 | C1.2 119.46,78.85 119.58,78.85
+12V1  (2 unrouted)
  Top 2.54: U$6.VCC@1 72.87,86.2 74.14,84.92 SW2.2 90.14,84.92 91.16,85.94 R1.2 | U$6.VCC@3 55.13,101.05 37.69,101.05 35.15,103.59 35.15,113.75 36.1,114.71 U$1.VCC@1 U$1.VCC@3
  Bottom 2.54: U$6.VCC@1 U$6.VCC@3
A_01  (via drill 0.7)
  Top 0.61: R19.2 112.49,155.66 v113.89,155.66 | 155.8,148.04 151.99,148.04 150.72,149.31 v149.45,149.31 | 155.8,148.04 157.07,146.77 C4.1 | 155.8,148.04 158.34,148.04 160.88,150.58 165.96,150.58 168.5,148.04 X1.P$16
  Bottom 0.61: v149.45,149.31 149.45,150.58 144.37,155.66 131.67,155.66 130.4,154.39 115.16,154.39 v113.89,155.66
A_02  (via drill 0.7)
  Top 0.61: R21.2 130.53,158.2 v141.83,158.2 | C6.1 151.86,145.63 | 151.86,145.63 v150.72,146.77 | 151.86,145.63 150.72,144.49 150.72,140.42 151.99,139.15 160.88,139.15 v162.15,140.42
  Bottom 0.61: v141.83,158.2 143.1,158.2 148.18,153.12 150.72,153.12 151.99,151.85 151.99,148.04 v150.72,146.77 | v162.15,140.42 165.96,144.23 X1.P$15
A_03  (via drill 0.7)
  Top 0.61: R23.2 152.24,164.43 152.24,163.03 153.39,161.89 C8.1 162.28,161.89 163.42,160.74 163.42,155.66 v162.15,154.39 | X1.P$14 165.96,144.23 v165.96,146.77
  Bottom 0.61: v165.96,146.77 163.42,146.77 162.15,148.04 v162.15,154.39
A_04  (via drill 0.7)
  Top 0.61: R25.2 166.09,175.98 C10.1 166.09,169.76 v164.69,168.36 | v164.69,149.31 164.69,140.42 165.96,139.15 X1.P$13
  Bottom 0.61: v164.69,168.36 v164.69,149.31
A_05  (via drill 0.7)
  Top 0.61: R49.2 176.25,169.51 177.52,168.24 C14.1 177.52,162.14 v174.85,159.47 | v173.58,148.04 173.58,141.69 X1.P$12
  Bottom 0.61: v174.85,159.47 173.58,158.2 v173.58,148.04
A_06  (via drill 0.7)
  Top 0.61: R27.2 C12.1 181.33,148.04 v181.2,148.04 | v176.12,142.96 176.12,141.69 X1.P$11
  Bottom 0.61: v181.2,148.04 v176.12,142.96
A_07  (via drill 0.7)
  Top 0.61: C18.1 193.65,139.03 R55.2 186.41,135.34 v186.28,135.34 | v179.93,134.07 177.39,131.53 X1.P$10
  Bottom 0.61: v186.28,135.34 181.2,135.34 v179.93,134.07
A_08  (via drill 0.7)
  Top 0.61: R29.2 196.31,125.06 195.17,123.91 195.17,121.5 C15.1 v188.82,121.37 | v182.47,128.99 X1.P$9
  Bottom 0.61: v188.82,121.37 186.28,121.37 182.47,125.18 v182.47,128.99
A_09  (via drill 0.7)
  Top 0.61: C19.1 200.25,92.04 R31.2 191.49,92.04 v191.36,92.16 | v186.28,108.67 183.74,111.21 183.74,116.29 181.2,118.83 176.12,118.83 171.04,123.91 X1.P$7
  Bottom 0.61: v191.36,92.16 186.28,97.24 v186.28,108.67
A_10  (via drill 0.7)
  Top 0.61: C23.1 202.54,106.01 R34.2 198.85,106.13 v191.36,106.13 | v186.28,111.21 186.28,116.29 181.2,121.37 176.12,121.37 171.04,126.45 X1.P$8
  Bottom 0.61: v191.36,106.13 v186.28,111.21
A_11  (via drill 0.7)
  Top 0.61: v84.68,19.77 88.88,15.57 U$32.23/A9 | R40.2 69.57,15.96 C27.1 70.84,19.77 v71.98,19.77
  Bottom 0.61: v71.98,19.77 v84.68,19.77
A_12  (via drill 0.7)
  Top 0.61: R46.2 C31.1 13.69,112.48 v17.37,112.48 | v21.18,112.48 22.45,112.48 22.45,107.4 35.15,94.7 35.15,74.38 40.23,69.3 74.52,69.3 92.69,51.13 U$32.39/A20
  Bottom 0.61: v21.18,112.48 v17.37,112.48
A_13  (via drill 0.7)
  Top 0.61: R52.2 9.88,98.39 12.29,95.97 12.29,94.83 C35.1 14.83,94.7 v16.1,95.97 | v21.18,97.24 26.26,92.16 30.07,92.16 32.61,89.62 32.61,71.84 40.23,64.22 54.2,64.22 54.2,59.14 56.74,56.6 82.14,56.6 90.15,48.59 U$32.A21
  Bottom 0.61: v21.18,97.24 17.37,97.24 v16.1,95.97
A_14  (via drill 0.7)
  Top 0.61: R58.2 C39.1 18.51,79.46 v21.18,79.46 | v74.52,24.85 84.68,24.85 87.73,21.81 96.23,21.81 U$32.21/A7 | v28.8,78.19 28.8,56.6 33.88,51.52 42.77,51.52 v69.44,24.85
  Bottom 0.61: v74.52,24.85 v69.44,24.85 | v28.8,78.19 27.53,79.46 v21.18,79.46
A_15  (via drill 0.7)
  Top 0.61: R61.2 37.56,40.09 C22.1 37.82,40.22 v40.23,42.63 | v64.36,21.04 v46.58,38.82 | U$32.22/A8 96.99,18.5 88.49,18.5 v85.95,21.04
  Bottom 0.61: v85.95,21.04 v64.36,21.04 | v46.58,38.82 45.31,40.09 45.31,41.36 44.04,42.63 v40.23,42.63
A_16  (via drill 0.7)
  Top 0.61: v46.58,162.01 51.66,167.09 51.66,173.57 C43.1 52.8,178.27 R64.2 | v41.5,155.66 41.5,151.85 45.31,148.04 55.47,148.04 58.01,145.5 58.01,126.45 63.09,121.37 v63.09,116.29 | v74.52,82 74.52,80.73 75.79,79.46 80.87,79.46 96.5,63.83 U$32.34/A15 | v74.52,88.35 74.52,90.89 66.9,98.51 v66.9,109.94
  Bottom 0.61: v46.58,162.01 46.58,160.74 v41.5,155.66 | v63.09,116.29 63.09,113.75 v66.9,109.94 | v74.52,82 v74.52,88.35
A_17  (via drill 0.7)
  Top 0.61: C29.1 R67.2 41.63,169.51 v42.77,168.36 | v63.09,109.94 64.36,108.67 64.36,98.51 v71.98,90.89 | v71.98,83.27 71.98,79.46 73.25,78.19 79.6,78.19 96.5,61.29 U$32.35/A16
  Bottom 0.61: v42.77,168.36 42.77,159.47 38.96,155.66 38.96,144.23 44.04,139.15 44.04,116.29 48.48,111.85 61.18,111.85 v63.09,109.94 | v71.98,83.27 v71.98,90.89
A_18  (via drill 0.7)
  Top 0.61: R70.2 28.8,156.81 C47.1 32.74,156.81 v33.88,155.66 | v41.5,103.59 56.74,103.59 v69.44,90.89 | v31.34,106.13 31.34,115.02 36.42,120.1 v36.42,145.5 | v69.44,83.27 69.44,79.46 71.98,76.92 77.06,76.92 94.84,59.14 96.99,59.14 U$32.36/A17
  Bottom 0.61: v41.5,103.59 33.88,103.59 v31.34,106.13 | v36.42,145.5 33.88,148.04 v33.88,155.66 | v69.44,83.27 v69.44,90.89
A_19  (via drill 0.7)
  Top 0.61: v28.8,137.88 28.8,106.13 37.69,97.24 38.96,97.24 40.23,95.97 40.23,75.65 41.5,74.38 77.06,74.38 95.23,56.21 U$32.37/A18 | R73.2 20.16,146.9 C49.1 26.26,144.36 v26.26,142.96
  Bottom 0.61: v28.8,137.88 26.26,140.42 v26.26,142.96
A_20  (via drill 0.7)
  Top 0.61: R76.2 14.96,131.28 C51.1 16.1,128.99 v17.37,130.26 | v21.18,126.45 21.18,121.37 23.72,118.83 23.72,109.94 37.69,95.97 37.69,75.65 41.5,71.84 77.06,71.84 95.23,53.67 U$32.38/A19
  Bottom 0.61: v21.18,126.45 v17.37,130.26
A_21  (via drill 0.7)
  Top 0.61: v59.28,145.5 59.28,126.45 65.63,120.1 v65.63,116.29 | v77.06,82 77.06,80.73 83.02,80.73 U$32.33/A14 | v77.06,88.35 77.06,90.89 68.17,99.78 v68.17,111.21 | C37.1 59.53,163.41 R84.2 62.96,163.41 v63.09,163.28
  Bottom 0.61: v59.28,145.5 59.28,153.12 63.09,156.93 v63.09,163.28 | v65.63,116.29 65.63,113.75 v68.17,111.21 | v77.06,82 v77.06,88.35
A_24  (via drill 0.7)
  Top 0.61: R92.2 91.16,162.14 92.3,163.28 v98.65,163.28 | v144.37,159.47 140.56,163.28 v110.08,163.28 | v160.88,148.04 C53.1 161.01,145.5 162.15,145.5 163.42,144.23 163.42,139.15 165.96,136.61 165.96,117.56 167.23,116.29 X1.P$4
  Bottom 0.61: v144.37,159.47 148.18,155.66 153.26,155.66 v160.88,148.04 | v98.65,163.28 v110.08,163.28
A_25  (via drill 0.7)
  Top 0.61: C79.1 131.8,18.5 R140.2 131.67,21.04 v130.4,22.31
  Bottom 0.61: v130.4,22.31 127.86,24.85 122.78,24.85 121.51,23.58 121.51,7.07 120.24,5.8 111.35,5.8 105,12.15 105,17.23 101.58,20.65 U$32.A11
A_26  (via drill 0.7)
  Top 0.61: C55.1 R94.2 165.83,41.49 v164.69,42.63 | v165.96,55.33 177.39,55.33 178.66,56.6 178.66,66.76 181.2,69.3 181.2,88.35 183.74,90.89 v183.74,95.97 | v183.74,106.13 179.93,109.94 179.93,113.75 178.66,115.02 173.58,115.02 169.77,118.83 X1.P$5
  Bottom 0.61: v164.69,42.63 164.69,54.06 v165.96,55.33 | v183.74,95.97 v183.74,106.13
A_27  (via drill 0.7)
  Top 0.61: R143.2 193.77,79.21 C81.1 192.5,78.19 v186.28,78.19 | v182.47,82 182.47,85.81 186.28,89.62 v186.28,93.43 | X1.P$6 171.04,121.37 174.85,117.56 179.93,117.56 182.47,115.02 182.47,109.94 185.01,107.4 v185.01,101.05
  Bottom 0.61: v186.28,78.19 v182.47,82 | v186.28,93.43 185.01,94.7 v185.01,101.05
AA_00  (via drill 0.7)
  Top 0.61: v110.08,93.43 129.13,112.48 144.37,112.48 145.64,113.75 145.64,121.37 146.91,122.64 146.91,126.45 148.18,127.72 149.45,127.72 150.72,128.99 150.72,134.07 X1.SIG
  Bottom 0.61: v110.08,93.43 107.54,90.89 107.54,69.3 110.08,66.76 112.23,66.76 U$32.32/A13
D1.1__FW  (via drill 0.7)
  Top 0.61: U$1.M1_FW_SIG 42.77,108.09 42.77,120.1 v38.96,123.91 | v26.26,99.78 31.34,94.7 32.61,94.7 33.88,93.43 33.88,73.11 41.5,65.49 55.47,65.49 58.01,62.95 71.98,62.95 75.79,59.14 82.14,59.14 v91.03,50.25
  Bottom 0.61: v38.96,123.91 36.42,123.91 26.26,113.75 v26.26,99.78 | U$32.14/A0 96.5,38.43 93.57,41.36 93.57,47.71 v91.03,50.25
D1.2__RW  (via drill 0.7)
  Top 0.61: v69.44,28.66 30.07,68.03 v30.07,89.62 | v74.52,27.39 85.95,27.39 90.15,23.19 U$32.20/A6
  Bottom 0.61: v74.52,27.39 73.25,28.66 v69.44,28.66 | v30.07,89.62 30.07,94.7 33.88,98.51 42.77,98.51 46.84,102.59 U$1.M1_RW_SIG
D2.1__FW  (via drill 0.7)
  Top 0.61: v79.6,60.41 72.49,67.53 v44.55,67.53 | v36.42,84.54 v36.42,90.89 | U$32.A22 v91.42,46.05
  Bottom 0.61: v79.6,60.41 83.41,56.6 83.41,51.52 88.88,46.05 v91.42,46.05 | v44.55,67.53 36.42,75.65 v36.42,84.54 | v36.42,90.89 41.5,95.97 44.04,95.97 49.38,101.32 U$1.M2_FW_SIG
D2.2__RW  (via drill 0.7)
  Top 0.61: v44.04,87.08 49.12,87.08 54.2,92.16 v54.2,97.24 | v45.31,56.6 31.34,70.57 v31.34,87.08 | v52.93,55.33 80.87,55.33 89.76,46.44 89.76,43.51 U$32.15/A1
  Bottom 0.61: v31.34,87.08 v44.04,87.08 | v54.2,97.24 54.46,97.51 U$1.M2_RW_SIG | v52.93,55.33 46.58,55.33 v45.31,56.6
D3.1__FW  (via drill 0.7)
  Top 0.61: v47.85,62.95 47.85,54.06 58.01,43.9 59.28,43.9 v68.17,35.01 | v45.31,85.81 58.01,85.81 62.37,81.46 U$6.M1_FW_SIG | v74.52,35.01 v82.14,35.01
  Bottom 0.61: v47.85,62.95 47.85,66.76 38.96,75.65 38.96,79.46 v45.31,85.81 | U$32.16/A2 92.69,33.35 91.03,35.01 v82.14,35.01 | v68.17,35.01 v74.52,35.01
D3.2__RW  (via drill 0.7)
  Top 0.61: v50.39,62.95 50.39,55.33 52.93,52.79 71.98,52.79 75.79,48.98 84.68,48.98 88.49,45.17 88.49,39.7 U$32.17/A3 | v46.58,84.54 55.47,84.54 57.29,82.73 U$6.M1_RW_SIG
  Bottom 0.61: v50.39,62.95 50.39,68.03 41.5,76.92 41.5,79.46 v46.58,84.54
GND  (via drill 0.7, 1.3, 2.54)
  Top 0.61: C82.2 202.92,87.08 v204.06,87.08 205.33,88.35 205.33,89.5 C19.2 | C20.2 200.38,98.39 202.62,96.14 IR9.2 | 196.31,135.34 201.52,135.34 202.79,134.07 202.79,131.94 IR8.2 | 196.31,135.34 C16.2 | 196.31,135.34 196.31,138.9 C18.2 | 183.61,153 C12.2 181.07,150.58 v179.93,150.58 | C21.2 193.77,151.85 195.17,151.85 196.44,150.58 196.44,147.93 IR7.2 | C13.2 183.61,167.09 185.01,167.09 187.55,164.55 187.55,162.87 IR6.2 | C14.2 174.85,165.7 v174.85,163.28 | C17.2 173.45,179.79 174.85,179.79 176.12,178.52 176.12,175.98 IR5.2 | C10.2 163.29,171.03 v163.42,170.9 | C9.2 143.1,164.43 v143.1,163.28 | v154.53,167.09 154.53,165.95 C8.2 155.93,164.55 v159.61,164.55 | C50.2 17.37,144.23 | C49.2 17.5,144.11 17.37,144.23 | C51.2 10.4,130.75 IR20.2 | C52.2 7.21,125.06 v7.21,122.64 | C32.2 4.67,107.4 | 4.67,107.4 3.4,108.67 3.4,112.48 4.48,113.56 IR12.2 | 4.67,107.4 3.4,106.13 3.4,97.24 4.48,96.16 IR13.2 8.16,96.16 C35.2 9.62,91.15 C36.2 | C31.2 15.97,115.15 v16.1,115.02 | C40.2 14.96,78.19 11.02,78.19 10.23,78.98 IR14.2 | C39.2 19.78,83.4 v19.91,83.27 | C48.2 18.64,158.08 18.64,160.74 20.12,162.22 IR18.2 23.09,166.46 24.86,168.24 C30.2 | C47.2 32.48,159.6 v33.88,158.2 | 55.6,171.16 C43.2 55.47,174.84 v55.47,177.25 | 55.6,171.16 C38.2 | 55.6,171.16 58.11,171.16 IR21.2 60.36,166.9 56.87,163.41 C37.2 | C79.2 139.42,13.42 C80.2 138.15,11.01 v136.75,9.61 | C81.2 196.57,74.51 v195.17,73.11 | C53.2 C4.2 | C4.2 C6.2 | C4.2 v157.07,140.42 | C54.2 80.74,157.06 v78.33,159.47 | C44.2 47.64,182.67 | C27.2 66.9,18.38 v66.9,15.96 | C55.2 173.71,29.93 174.85,29.93 176.12,31.2 176.12,33.74 | 176.12,33.74 IR25.2 | C56.2 179.93,37.68 179.93,35.01 178.66,33.74 176.12,33.74
  Top 0.61: C24.2 197.58,112.36 v196.44,111.21 | C23.2 206.6,107.28 206.6,112.48 205.52,113.56 IR10.2 | C15.2 v200.25,121.37 | C11.2 161.01,185.42 IR4.2 | IR17.2 35.15,174.71 C29.2 | 17.37,144.23 14.48,147.12 IR19.2 | IR15.2 37.56,37.43 C22.2 | v42.77,28.66 C26.2 | C28.2 81,10.15 IR11.2 | C44.2 47.98,186.45 IR16.2 | C44.2 47.85,182.21 v47.85,179.79 | C7.2 116.45,156.79 v116.45,155.69 | PIXY1.6 v92.3,120.1 | C5.2 v93.57,160.74
  Top 1.27: 124.05,90.89 122.78,89.62 JP6.2 122.78,84.54 121.51,83.27 118.97,83.27 117.57,84.67 C1.1 | 124.05,90.89 C59.1 | 124.05,90.89 124.18,91.02 C2.1 | U$32.AGND 93.13,10.49 S1.A | C60.1 v110.08,71.84
  Top 2.54: C3.- v108.81,99.78
  Bottom 1.27: U$58.10 U$58.4
  pour Bottom (isolate 0.406): -13.11,206.46 228.19,206.46 228.19,-6.9 226.92,-8.17 -10.57,-8.17 -13.11,-5.63
K1  (via drill 0.7)
  Top 0.61: R79.1 84.75,13.23 S1.D S1.B 92.3,14.16 97.85,14.16 98.59,13.42 101.19,13.42 102.46,14.69 102.46,18.11 102.46,22.31 101.19,23.58 v101.19,37.55 | v110.08,43.9 v110.08,47.71
  Bottom 0.61: v101.19,37.55 107.54,43.9 v110.08,43.9 | v110.08,47.71 110.96,47.71 U$32.24
K2
  Top 0.61: R80.1 124.05,14.69 | 124.05,14.69 124.05,14.31 S2.B | 124.05,14.69 120.33,14.69 S2.D
  Bottom 0.61: S2.D 118.75,14.52 U$32.4
LI1
  Top 0.61: R6.2 162.15,116.17 D5.K 163.42,112.48 167.23,108.67 X1.P$1
LI2
  Top 0.61: X1.P$2 167.23,111.21 164.69,113.75 164.69,118.96 R5.2 162.28,125.06 D3.K
LI3  (via drill 0.7)
  Top 0.61: D2.K 162.28,135.22 R7.2 163.42,129.12 v163.42,127.72
  Bottom 0.61: v163.42,127.72 164.69,126.45 164.69,117.56 X1.P$3
MISO  (via drill 0.7)
  Top 0.61: v107.54,60.41 111.49,56.46 111.49,43.05 112.62,41.92 U$32.12 | PIXY1.1 82.14,116.29 83.41,115.02 91.03,115.02 92.3,116.29 v92.3,117.56
  Bottom 0.61: v107.54,60.41 106.27,61.68 106.27,74.38 101.19,79.46 101.19,108.94 100.48,109.65 100.48,110.65 93.57,117.56 v92.3,117.56
MOSI  (via drill 0.7)
  Top 0.61: U$32.11 108.67,42.39 108.67,54.14 105,57.81 v105,65.49
  Bottom 0.61: v105,65.49 105,73.11 99.92,78.19 99.92,93.43 96.11,97.24 96.11,111.21 89.76,117.56 89.76,121.37 88.49,122.64 84.68,122.64 PIXY1.4
N$1
  Top 1.27: U$6.M1_FW 57.76,122.4 JP4.2
N$2
  Top 2.54: SW1.1 151.1,103.21 155.62,98.69 F1.2
N$3
  Top 1.27: U$6.M1_RW 55.22,122.4 JP4.1
N$4
  Top 2.54: F2.1 125.32,73.11 JP5.3 118.97,71.84 C60.2
N$5
  Top 1.27: U$6.M2_FW 52.68,121.62 JP7.2
N$6
  Top 1.27: U$6.M2_RW 50.14,117.81 49.12,118.83 JP7.1
N$7
  Top 0.61: LED3.A 54.07,132.93 R2.2
N$8
  Top 0.61: R3.2 LED1.A
N$10
  Top 0.61: LED2.A 52.8,140.55 R4.2
N$12
  Top 1.27: D4.1 R1.1
N$20
  Top 2.54: 127.86,106.13 PL3.1 | 127.86,106.13 135.48,98.51 SW1.U | R85.2 111.35,89.62 127.86,106.13
N$21
  Top 0.61: R19.1 111.22,159.47 110.08,159.47 107.54,156.93 R20.1 IR1.1
N$24
  Top 0.61: R33.1 C5.1 100.05,162.14 101.19,163.28 105.12,163.28 IR1.3
N$25
  Top 0.61: R21.1 R22.1 124.05,157.06 IR2.1
N$26  (via drill 0.7)
  Top 0.61: C7.1 R36.1 | R36.1 119.1,160.74 | R36.1 121.38,160.87 v121.51,160.74
  Bottom 0.61: v121.51,160.74 121.51,162.01 122.78,163.28 127.86,163.28 129.13,162.01 IR2.3
N$27
  Top 0.61: R24.1 149.32,162.27 R23.1 149.45,164.68 149.45,165.82 147.11,168.16 IR3.1
N$28  (via drill 0.7)
  Top 0.61: C9.1 144.37,169.63 145.64,170.9 150.72,170.9 152.17,169.45 IR3.3 | R37.1 v146.91,165.82
  Bottom 0.61: IR3.3 150.72,167.23 148.32,167.23 v146.91,165.82
N$29
  Top 0.61: R26.1 159.61,175.98 160.88,177.25 R25.1 162.15,177.38 162.15,178.52 163.42,179.79 163.42,181.06 167.23,184.87 167.23,186.14 164.69,188.68 160.88,188.68 160.06,187.86 IR4.1
N$30  (via drill 0.7)
  Top 0.61: R38.1 158.21,178.52 C11.1 158.21,183.32 158.5,183.6 v159.61,183.6
  Bottom 0.61: v159.61,183.6 162.56,183.6 IR4.3
N$31  (via drill 0.7)
  Top 0.61: R28.1 182.6,156.93 R27.1 183.74,157.06 v183.74,159.47
  Bottom 0.61: v183.74,159.47 183.74,162.6 IR6.1
N$32
  Top 0.61: R39.1 181.2,159.35 C13.1 181.33,162.01 183.74,162.01 185.61,160.14 IR6.3
N$33  (via drill 0.7)
  Top 0.61: R30.1 195.42,127.85 R29.1 196.57,127.72 v198.98,127.72
  Bottom 0.61: v198.98,127.72 198.98,131.25 IR8.1
N$34  (via drill 0.7)
  Top 0.61: R32.1 197.84,95.97 R31.1 199.11,94.7 v201.52,94.7
  Bottom 0.61: IR9.1 204.67,98.51 202.79,98.51 201.52,97.24 v201.52,94.7
N$35
  Top 0.61: R43.1 196.69,101.18 C20.1 206.47,101.18 207.87,99.78 207.87,95.97 205.51,93.61 IR9.3
N$36  (via drill 0.7)
  Top 0.61: v201.52,109.94 200.25,109.94 199.11,108.8 R34.1 198.85,108.67 195.17,108.67 194.03,109.82 R35.1
  Bottom 0.61: IR10.1 202.79,114.51 202.79,111.21 v201.52,109.94
N$37
  Top 0.61: R44.1 199.11,116.29 C24.1 204.37,111.03 IR10.3
N$38
  Top 0.61: R42.1 192.76,128.99 C16.1 197.84,131.41 200.94,128.3 IR8.3
N$39  (via drill 0.7)
  Top 0.61: R50.1 171.04,167.09 173.45,169.51 R49.1 v173.45,172.05
  Bottom 0.61: v173.45,172.05 173.45,176.91 IR5.1
N$40
  Top 0.61: R41.1 74.52,13 73.55,12.03 R40.1 70.71,9.61 71.98,8.34 73.25,8.34 75.79,5.8 79.76,5.8 IR11.1
N$41
  Top 0.61: IR11.3 76.66,10.61 C28.1 78.2,15.71 R45.1
N$42  (via drill 0.7)
  Top 0.61: R47.1 R46.1 9.62,115.15 9.62,116.42 v8.48,117.56
  Bottom 0.61: IR12.1 5.36,111.21 7.21,111.21 7.21,116.29 v8.48,117.56
N$43
  Top 0.61: R48.1 C32.1 9.75,107.53 9.75,108.67 7.21,111.21 7.21,114.51 IR12.3
N$44
  Top 0.61: R51.1 169.77,171.03 C17.1 169.9,173.44 177.17,173.44 IR5.3
N$45  (via drill 0.7)
  Top 0.61: v193.7,141.82 R55.1 189.07,141.82 R56.1
  Bottom 0.61: v193.7,141.82 193.7,148.57 IR7.1
N$46
  Top 0.61: R57.1 186.28,145.38 C21.1 190.22,145.5 192.63,145.5 193.9,144.23 196.11,144.23 IR7.3
N$47
  Top 0.61: R62.1 R61.1 30.07,38.95 30.07,35.01 33.88,31.2 35.15,31.2 36.09,32.14 IR15.1
N$48  (via drill 0.7)
  Top 0.61: C26.1 R63.1 40.36,35.01 v40.23,35.01
  Bottom 0.61: IR15.3 35.48,35.95 36.42,35.01 v40.23,35.01
N$49
  Top 0.61: R68.1 38.83,168.62 R67.1 37.56,172.17 34.1,172.17 IR17.1
N$50
  Top 0.61: IR17.3 32.73,177.37 30.07,174.71 30.07,172.3 C30.1 33.88,171.03 R69.1
N$51  (via drill 0.7)
  Top 0.61: R87.1 R84.1 60.68,160.74 63.09,160.74 65.63,163.28 v65.63,167.09
  Bottom 0.61: IR21.1 60.05,170.9 64.36,170.9 65.63,169.63 v65.63,167.09
N$52  (via drill 0.7)
  Top 0.61: R124.1 55.34,158.33 54.2,159.47 C38.1 55.6,166.97 v56.74,165.82
  Bottom 0.61: IR21.3 62.89,168.16 60.55,165.82 v56.74,165.82
N$53  (via drill 0.7)
  Top 0.61: R53.1 12.04,101.18 R52.1 9.62,101.05 v7.21,101.05
  Bottom 0.61: IR13.1 6.14,93.63 7.21,94.7 v7.21,101.05
N$54  (via drill 0.7)
  Top 0.61: R54.1 14.7,89.5 13.43,88.23 C36.1 9.62,88.35 7.21,88.35 v4.67,90.89
  Bottom 0.61: IR13.3 5,98.51 3.4,98.51 2.13,97.24 2.13,93.43 v4.67,90.89
N$59  (via drill 0.7)
  Top 0.61: R59.1 16.1,87.08 13.56,84.54 R58.1 13.43,83.27 v11.02,83.27
  Bottom 0.61: v11.02,83.27 11.02,76.92 10.63,76.53 IR14.1
N$60
  Top 0.61: 19.66,77.05 R60.1 19.78,75.53 18.64,74.38 16.23,74.38 C40.1 15.97,74.38 7.21,74.38 5.94,75.65 5.94,79.64 IR14.3
N$61
  Top 0.61: R93.1 90.9,158.2 R92.1 88.36,162.14 87.22,163.28 82.14,163.28 80.87,162.01 IR23.1
N$62
  Top 0.61: C54.1 R127.1 85.95,157.06 IR23.3
N$63
  Top 0.61: R95.1 168.63,43.65 R94.1 172.77,35.95 IR25.1
N$64  (via drill 0.7)
  Top 0.61: R128.1 172.31,43.9 173.45,42.76 C56.1 173.58,41.24 v173.58,37.55
  Bottom 0.61: IR25.3 173.58,32.69 v173.58,37.55
N$66  (via drill 0.7)
  Top 0.61: R65.1 49.12,177.38 R64.1 v50.26,183.73
  Bottom 0.61: IR16.1 45.74,185.71 46.58,184.87 49.12,184.87 v50.26,183.73
N$67  (via drill 0.7)
  Top 0.61: C44.1 45.34,182.49 | C44.1 45.31,182.21 R66.1 | C44.1 42.77,184.75 v42.77,184.87
  Bottom 0.61: v42.77,184.87 42.77,186.14 45.31,188.68 49.11,188.68 IR16.3
N$72
  Top 0.61: R71.1 28.92,164.31 27.53,164.31 R70.1 25.12,160.87 24.39,160.14 IR18.1
N$73  (via drill 0.7)
  Top 0.61: v23.85,157.93 C48.1 24.86,155.66 R72.1
  Bottom 0.61: IR18.3 24.55,158.63 v23.85,157.93
N$75  (via drill 0.7)
  Top 0.61: R74.1 27.4,148.17 26.13,149.44 R73.1 18.77,149.44 17.37,148.04 v17.37,146.77
  Bottom 0.61: IR19.1 15.42,144.82 v17.37,146.77
N$76
  Top 0.61: R75.1 20.93,140.3 C50.1 14.96,140.3 13.56,141.69 13.33,141.93 11.02,144.23 11.02,148.04 12.4,149.43 IR19.3
N$78
  Top 0.61: R77.1 15.85,135.47 R76.1 7.34,135.47 5.94,134.07 5.94,130.1 IR20.1
N$79  (via drill 0.7)
  Top 0.61: R78.1 C52.1 9.88,126.17 9.75,126.29 v9.75,127.72
  Bottom 0.61: v9.75,127.72 9.75,132.52 IR20.3
N$100
  Top 0.61: R141.1 127.99,13.42 130.4,13.42 | 130.4,13.42 131.67,14.69 R140.1 | IR24.1 133.34,10.48 130.4,13.42
N$101  (via drill 0.7)
  Top 0.61: v135.48,15.96 135.48,13.55 C80.1 135.35,8.22 132.94,5.8 129.13,5.8 128.44,6.5 IR24.3 | R142.1 135.61,22.19 v136.75,21.04
  Bottom 0.61: v136.75,21.04 136.75,17.23 v135.48,15.96
N$102
  Top 0.61: R144.1 192.88,83.4 R143.1 196.31,83.4 198.29,81.43 IR26.1
N$103
  Top 0.61: R145.1 197.58,87.08 C82.1 198.85,83.4 198.98,83.27 204.06,83.27 205.33,82 205.33,79.46 202.39,76.52 IR26.3
N$107
  Top 1.27: R85.1 D16.1
N$113
  Top 1.27: R86.1 D1.1
PWM_M1  (via drill 0.7)
  Top 0.61: U$32.5 103.59,32.23 103.59,54.14 102.46,55.27 102.46,66.76 v99.92,69.3 | v94.84,92.16 93.01,93.99 92.01,93.99 86.22,99.78 v75.79,99.78 | v59.28,103.59 58.01,104.86 45.31,104.86 44.3,105.87 U$1.M1_PWM_SIG
  Bottom 0.61: v99.92,69.3 96.11,73.11 96.11,90.89 v94.84,92.16 | v75.79,99.78 63.09,99.78 v59.28,103.59
PWM_M2  (via drill 0.7)
  Top 0.61: U$32.6 106.13,32.23 106.13,54.14 103.73,56.54 103.73,68.03 v101.19,70.57 | v97.38,93.43 93.57,97.24 91.03,97.24 79.6,108.67 v77.06,108.67
  Bottom 0.61: v101.19,70.57 97.38,74.38 v97.38,93.43 | v77.06,108.67 61.82,108.67 60.55,109.94 52.93,109.94 51.66,108.67 51.66,107.35 U$1.M2_PWM_SIG
PWM_M3  (via drill 0.7)
  Top 0.61: U$32.29 107.54,63.83 107.54,66.76 102.46,71.84 97.38,71.84 v93.57,75.65 | v75.79,61.68 71.98,65.49 v64.36,65.49
  Bottom 0.61: v93.57,75.65 89.76,75.65 v75.79,61.68 | v64.36,65.49 59.83,70.03 U$6.M1_PWM_SIG
RX2
  Bottom 0.61: U$32.9 124.05,44.78 BODEN.5
RXB  (via drill 0.7)
  Top 0.61: v159.61,82 159.61,94.7 166.47,101.56 U$28.TX | v122.78,36.28 125.32,38.82 125.32,45.17 130.4,50.25 v130.4,57.87 | v143.1,66.76 143.1,75.65 v146.91,79.46
  Bottom 0.61: U$32.7 114.77,28.27 v122.78,36.28 | v146.91,79.46 157.07,79.46 v159.61,82 | v130.4,57.87 134.21,61.68 138.02,61.68 v143.1,66.76
S_0  (via drill 0.7)
  Top 0.61: U$32.0 121.51,19.38 121.51,21.04 130.4,29.93 154.53,29.93 159.61,35.01 159.61,52.79 164.69,57.87 174.85,57.87 177.39,60.41 177.39,69.3 179.93,71.84 179.93,89.62 182.47,92.16 v182.47,93.43 | v155.8,103.59 153.26,106.13 153.26,113.75 150.72,116.29 150.72,123.91 X1.S0
  Bottom 0.61: v182.47,93.43 181.2,94.7 181.2,99.78 179.93,101.05 158.34,101.05 v155.8,103.59
S_1  (via drill 0.7)
  Top 0.61: U$32.1 120.24,20.65 120.24,61.68 125.32,66.76 130.4,66.76 131.67,68.03 131.67,76.92 134.21,79.46 136.75,79.46 v149.45,92.16 | v148.18,107.4 148.18,123.91 X1.S1
  Bottom 0.61: v148.18,107.4 148.18,94.7 149.45,93.43 v149.45,92.16
S_2  (via drill 0.7)
  Top 0.61: U$32.2 117.7,20.65 117.7,62.95 122.78,68.03 v124.05,68.03 | v134.21,68.03 135.48,69.3 135.48,76.92 136.75,78.19 138.02,78.19 150.72,90.89 v150.72,98.51 | v150.72,107.4 v150.72,113.75
  Bottom 0.61: v124.05,68.03 v134.21,68.03 | v150.72,98.51 v150.72,107.4 | v150.72,113.75 151.99,115.02 154.53,115.02 157.07,117.56 157.07,128.99 154.53,131.53 X1.S2
S_3  (via drill 0.7)
  Top 0.61: U$32.3 115.16,20.65 115.16,62.95 v118.97,66.76 | v136.75,68.03 138.02,69.3 138.02,75.65 v150.72,88.35
  Bottom 0.61: v118.97,66.76 135.48,66.76 v136.75,68.03 | v150.72,88.35 153.26,90.89 153.26,104.86 155.8,107.4 155.8,113.75 158.34,116.29 158.34,130.26 154.53,134.07 X1.S3
SCK  (via drill 0.7)
  Top 0.61: v79.6,82 84.68,82 101.19,65.49 101.19,44.78 U$32.13 | v79.6,88.35 79.6,93.43 74.52,98.51 74.52,108.67 v77.06,111.21
  Bottom 0.61: v79.6,82 v79.6,88.35 | PIXY1.3 78.33,111.21 v77.06,111.21
SCL_2
  Top 0.61: U$58.8 68.17,46.44 73.25,41.36 MAGNETFELD.2 84.68,41.36 85.95,40.09 85.95,37.16 U$32.19/A5
SCL_ULT  (via drill 0.7)
  Top 0.61: JP2.3 103.73,113.75 105,112.48 108.81,112.48 v110.08,111.21 111.35,109.94 111.35,108.67 112.62,107.4 JP1.3 | JP3.3 96.11,104.86 101.19,109.94 v106.27,109.94
  Bottom 0.61: U$58.2 82.14,73.11 82.14,93.43 JP3.3 | v106.27,109.94 108.81,109.94 v110.08,111.21
SDA_2
  Top 0.61: U$58.7 75.79,43.9 MAGNETFELD.3 85.95,43.9 87.22,42.63 87.22,38.43 U$32.18/A4
SDA_ULT  (via drill 0.7)
  Top 0.61: 101.19,113.75 103.73,111.21 107.54,111.21 110.08,108.67 110.08,106.13 111.35,104.86 JP1.2 | 101.19,113.75 JP2.2 | 101.19,113.75 101.19,112.48 96.11,107.4 JP3.2 91.03,104.86 v91.03,99.78
  Bottom 0.61: U$58.1 89.76,78.19 89.76,80.73 91.03,82 v91.03,99.78
TX2
  Bottom 0.61: U$32.10 118.97,42.24 118.97,50.25 121.51,52.79 BODEN.4
TXB  (via drill 0.7)
  Top 0.61: v158.34,89.62 158.34,97.24 163.93,102.83 U$28.RX | v121.51,37.55 122.78,38.82 122.78,46.44 124.05,47.71 125.32,47.71 127.86,50.25 v127.86,57.87
  Bottom 0.61: U$32.8 119.36,37.55 v121.51,37.55 | v158.34,89.62 154.53,89.62 140.56,75.65 140.56,68.03 135.48,62.95 132.94,62.95 v127.86,57.87